# Altium PCB MAIN.PcbDoc (part 2 of 2)
Units mm, origin at the board's own origin, x right, y up, seen from the top; angles counter-clockwise.
Board outline 40 x 35 mm, 2 copper layers (Top Layer, Bottom Layer); 40 components, 37 nets, 199 pads, 289 vias.
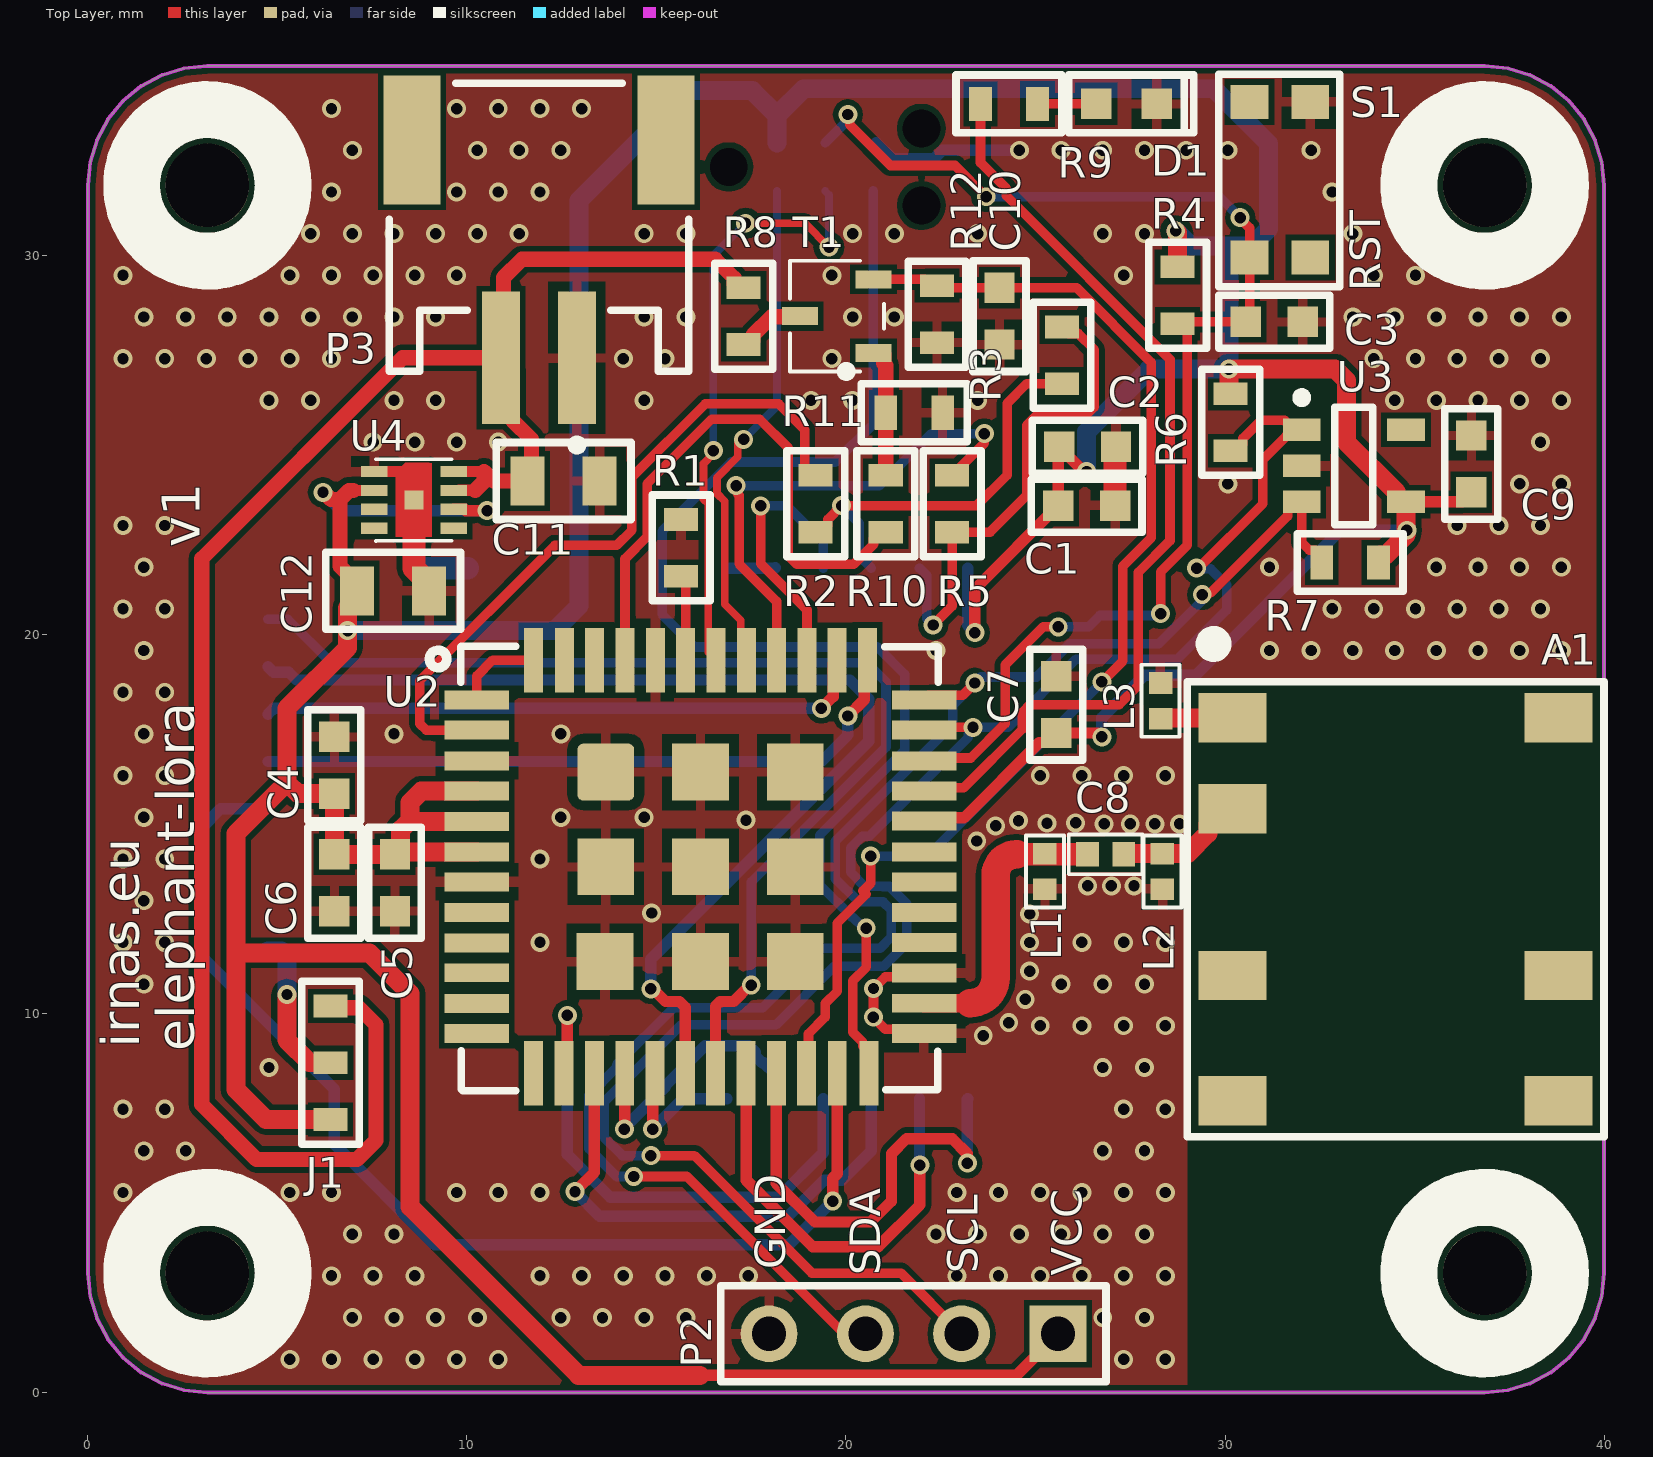
[diagram p0: Top Layer view]

## Via types
v1: diameter 0.5, hole 0.3, Top Layer to Bottom Layer, tented both sides, 289 vias

## Nets (pads, with @x,y where several pads share a name; then routed paths per layer and width w, separated by ;. In a path a pad name is that pad's centre, name@x,y a point inside that pad or via, vN(x,y) a via of type N, cw(c..) or ccw(c..) an arc to the next point about the centre after c; other vN are vias at no path point) (continued)
GND: (continued)
  other v1: 5.325,0.876 6.425,0.876 7.525,0.876 8.625,0.876 9.725,0.876 10.825,0.876 27.325,0.876 28.425,0.876 6.975,1.976 8.075,1.976 9.175,1.976 10.275,1.976 12.475,1.976 13.575,1.976 14.675,1.976 15.775,1.976 26.775,1.976 27.875,1.976 6.425,3.076 7.525,3.076 8.625,3.076 11.925,3.076 13.025,3.076 14.125,3.076 15.225,3.076 16.325,3.076 17.425,3.076 22.925,3.076 24.025,3.076 25.125,3.076 26.225,3.076 27.325,3.076 28.425,3.076 6.975,4.176 8.075,4.176 22.375,4.176 23.475,4.176 24.575,4.176 25.675,4.176 26.775,4.176 27.875,4.176 0.925,5.276 5.325,5.276 6.425,5.276 9.725,5.276 10.825,5.276 11.925,5.276 22.925,5.276 24.025,5.276 25.125,5.276 26.225,5.276 27.325,5.276 28.425,5.276 1.475,6.376 2.575,6.376 26.775,6.376 27.875,6.376 0.925,7.476 2.025,7.476 27.325,7.476 28.425,7.476 4.775,8.576 26.775,8.576 27.875,8.576 23.621,9.416 25.125,9.676 26.225,9.676 27.325,9.676 28.425,9.676 24.294,9.758 24.729,10.374 1.475,10.776 25.675,10.776 26.775,10.776 27.875,10.776 24.846,11.119 0.925,11.876 2.025,11.876 11.925,11.876 24.846,11.873 26.225,11.876 27.325,11.876 28.425,11.876 14.874,12.65 24.846,12.627 1.475,12.976 26.374,13.366 27,13.366 27.6,13.366 0.925,14.076 2.025,14.076 11.925,14.076 23.45,14.55 23.95,14.95 26.811,15.006 27.5,15.006 28.15,15.006 28.8,15.006 25.304,15.02 26.058,15.031 24.553,15.086 17.362,15.1 1.475,15.176 12.475,15.176 14.675,15.176 0.925,16.276 2.025,16.276 25.125,16.276 26.225,16.276 27.325,16.276 28.425,16.276 1.475,17.376 8.075,17.376 12.475,17.376 0.925,18.476 2.025,18.476 1.475,19.576 22.375,19.576 31.175,19.576 32.275,19.576 33.375,19.576 34.475,19.576 35.575,19.576 36.675,19.576 37.775,19.576 38.875,19.576 0.925,20.676 2.025,20.676 32.825,20.676 33.925,20.676 35.025,20.676 36.125,20.676 37.225,20.676 38.325,20.676 1.475,21.776 31.175,21.776 35.575,21.776 36.675,21.776 37.775,21.776 38.875,21.776 0.925,22.876 2.025,22.876 36.125,22.876 37.225,22.876 38.325,22.876 30.075,23.976 37.775,23.976 38.875,23.976 7.525,25.076 8.625,25.076 9.725,25.076 10.825,25.076 38.325,25.076 4.775,26.176 5.875,26.176 8.075,26.176 9.175,26.176 14.675,26.176 19.075,26.176 20.175,26.176 23.475,26.176 34.475,26.176 35.575,26.176 36.675,26.176 37.775,26.176 38.875,26.176 0.925,27.276 2.025,27.276 3.125,27.276 4.225,27.276 5.325,27.276 6.425,27.276 14.125,27.276 15.225,27.276 19.625,27.276 33.925,27.276 35.025,27.276 36.125,27.276 37.225,27.276 38.325,27.276 1.475,28.376 2.575,28.376 3.675,28.376 4.775,28.376 5.875,28.376 6.975,28.376 8.075,28.376 9.175,28.376 14.675,28.376 15.775,28.376 20.175,28.376 21.275,28.376 33.375,28.376 34.475,28.376 35.575,28.376 36.675,28.376 37.775,28.376 38.875,28.376 0.925,29.476 5.325,29.476 6.425,29.476 7.525,29.476 8.625,29.476 9.725,29.476 19.625,29.476 27.325,29.476 33.925,29.476 35.025,29.476 5.875,30.576 6.975,30.576 8.075,30.576 9.175,30.576 10.275,30.576 11.375,30.576 14.675,30.576 15.775,30.576 20.175,30.576 21.275,30.576 23.475,30.576 26.775,30.576 27.875,30.576 33.375,30.576 6.425,31.676 9.725,31.676 10.825,31.676 11.925,31.676 32.825,31.676 6.975,32.776 10.275,32.776 11.375,32.776 12.475,32.776 25.675,32.776 26.775,32.776 27.875,32.776 28.975,32.776 30.075,32.776 32.275,32.776 6.425,33.876 9.725,33.876 10.825,33.876 11.925,33.876 13.025,33.876
I2C1_SCL: P2.2 R6.1 U2.35 U3.1 | length 48.5
  Top Layer w0.254: v1(14.85,6.25) 16,6.25 19.102,3.148 21.452,3.148 P2.2 ; U2.35 22.135,17.55 v1(23.35,17.55) ; v1(29.25,21.75) 29.3,21.75 31,23.45 31,24.62 31.607,25.227 31.652,25.227 U3.1@31.825,25.4 ; R6.1 30.3,24.85 30.473,25.023 30.473,25.173 30.95,25.65 31.575,25.65 U3.1@31.825,25.4 ; U3.1 U3.1@31.825,25.4
  Bottom Layer w0.254: v1(14.85,6.25) 14.101,6.25 13.621,6.731 13.621,7.671 15.65,9.7 18.15,9.7 19.7,11.25 21,11.25 21.6,11.85 21.6,12.9 21.15,13.35 20.975,13.35 20.968,13.356 20.494,13.356 20.121,13.729 20.121,14.369 20.431,14.679 20.618,14.679 23.227,17.288 23.227,17.361 23.35,17.483 v1(23.35,17.55) 24.273,17.55 26.073,19.35 28.75,19.35 30.045,20.645 30.045,21.305 29.617,21.733 29.267,21.733 v1(29.25,21.75)
I2C1_SDA: P2.3 R7.1 U2.36 U3.3 | length 43.9
  Top Layer w0.254: v1(14.4,5.7) 15.8,5.7 19.95,1.55 P2.3 ; U2.36 22.178,18.393 23.073,18.393 v1(23.4,18.72) ; v1(29.4,21.05) 29.447,21.097 29.622,21.097 31.652,23.127 31.652,23.327 31.825,23.5 U3.3 32.025,22.425 32.227,22.223 32.377,22.223 32.55,22.05 R7.1
  Bottom Layer w0.254: v1(14.4,5.7) 13.95,5.7 13.214,6.436 13.214,7.839 13.95,8.575 13.95,8.65 15.45,10.15 17.801,10.15 19.372,11.721 20.896,11.721 21.194,12.018 21.194,12.732 20.982,12.944 20.806,12.944 20.8,12.95 20.325,12.95 19.714,13.561 19.714,14.538 22.821,17.644 22.821,18.141 v1(23.4,18.72) 23.557,18.877 25.026,18.877 25.905,19.756 28.255,19.756 29.4,20.901 v1(29.4,21.05)
LED: R9.1 U2.33 | length 24.8
  Top Layer w0.254: U2.33 22.143,15.958 23.108,15.958 24.65,17.5 24.65,17.947 24.853,18.15 27.205,18.15 27.711,18.656 27.711,21.636 28.55,22.475 28.55,27.255 24.229,31.576 24.229,31.769 23.55,32.449 R9.1
LORA_ANT: C8.1 L1.2 U2.26 | length 7.6
  Top Layer w0.5: U2.26 23.271,10.271
  Top Layer w0.6: 24.5,14.2 C8.1
  Top Layer w0.75: 23.271,10.271 ccw(c23.271,10.95) 23.95,10.95 ; 23.95,11.05 23.95,13.65 cw(c24.5,13.65) 24.5,14.2
LORA_BUSY: U1.14 U2.21 | length 12.1
  Top Layer w0.3: U2.21 18.162,5.518 19.182,4.498 20.648,4.498 21.2,5.05 21.2,6.3 21.6,6.7 22.8,6.7 23.2,6.3 v1(23.2,6.05)
  Bottom Layer w0.3: v1(23.2,6.05) 23.2,7.74 U1.14
LORA_RST: U1.15 U2.20 | length 11.4
  Top Layer w0.3: U2.20 17.37,8.413 17.37,5.599 19.119,3.85 20.85,3.85 21.95,4.95 v1(21.95,6)
  Bottom Layer w0.3: U1.15 21.94,6.01 v1(21.95,6)
MCU_IO1: P1.4 U2.23 | length 29.9
  Top Layer w0.3: v1(19.65,5.05) 19.65,5.654 19.769,5.773 U2.23
  Bottom Layer w0.3: P1.4 3.5,15.4 3,14.9 3,11.5 6.5,8 6.5,6.55 9.15,3.9 18.5,3.9 v1(19.65,5.05)
NetA1_1: A1.1 L3.2 | length 1.9
  Top Layer w0.5: L3.2 cw(c28.32,17.78) 28.32,17.8 A1.1
NetA1_2: A1.2 C8.2 L2.2 | length 3.5
  Top Layer w0.5: C8.2 cw(c27.35,14.2) 27.35,14.22 L2.2 29.02,14.22 29.55,14.75 29.55,15 29.95,15.4 A1.2
NetD1_2: D1.2 R9.2 | length 1.5
  Top Layer w0.254: R9.2 D1.2
NetR2_1: R2.1 R3.1 U1.7 | length 11.3
  Top Layer w0.254: R2.1 19.35,22.7 19.523,22.873 19.523,23.036 v1(19.887,23.4) 23.448,23.4 24.25,24.202 24.25,26.1 24.766,26.616 R3.1
  Bottom Layer w0.254: v1(19.887,23.4) 19.887,23.394 19.893,23.394 20.347,22.94 20.347,22.073 U1.7
NetR3_2: R3.2 R5.1 U1.8 | length 13.1
  Top Layer w0.254: v1(22.3,20.25) 22.8,20.75 R5.1 23.8,22.7 24.766,23.666 24.766,25.516 25.05,25.8 26.35,25.8 26.55,26 26.55,27.516 26.123,27.943 25.873,27.943 R3.2
  Bottom Layer w0.254: U1.8 22.132,21.558 22.132,20.418 v1(22.3,20.25)
NetR8_1: R8.1 T1.3 | length 1.9
  Top Layer w0.4: R8.1 17.45,27.65 17.55,27.75 17.55,27.9 18.033,28.383 18.763,28.383 T1.3
NetR10_2: R10.2 R11.2 T1.1 | length 3.5
  Top Layer w0.4: T1.1 20.955,27.43 20.995,27.39 20.995,27.155 21.05,27.1 R11.2 R10.2
NetU2_1: U2.1 U2.48 | length 2.3
  Top Layer w0.254: U2.1 10.26,18.91 10.675,19.325 U2.48
RESET: C3.2 CON1.3 R4.1 S1.1 U2.34 | length 34.5
  Top Layer w0.254: v1(20.05,33.72) 20.097,33.673 20.097,33.453 21.175,32.375 22.875,32.375 v1(23.7,31.55) ; U2.34 22.137,16.742 23.291,16.742 24.2,17.651 24.2,19.2 25.2,20.2 v1(25.6,20.2) v1@25.65,20.25 ; v1(28.3,20.55) 28.3,21.65 29,22.35 29,28 28.973,28.027 28.798,28.027 28.625,28.2 R4.1 28.8,28.25 C3.2 30.65,28.35 S1.1 30.65,30.728 30.4,30.978 v1(30.4,31)
  Bottom Layer w0.254: CON1.3 20.05,33.57 v1(20.05,33.72) ; v1(23.7,31.55) 29.85,31.55 v1(30.4,31) ; v1(25.6,20.2) 26.4,20.2 26.7,20.5 28.25,20.5 v1(28.3,20.55)
RXEN: U1.6 U2.39 | length 7.3
  Top Layer w0.254: v1(17.75,23.394) 17.75,21.87 18.97,20.65 U2.39
  Bottom Layer w0.254: v1(17.75,23.394) 18.441,23.394 19.4,22.435 U1.6
SPI2_MISO: U1.16 U2.15 | length 13.5
  Top Layer w0.3: v1(12.85,5.3) 13.362,5.811 U2.15
  Bottom Layer w0.3: v1(12.85,5.3) 13.5,4.65 18.469,4.65 19.421,5.602 19.879,5.602 19.887,5.595 20.668,6.376 20.668,7.748 U1.16
SPI2_MOSI: U1.17 U2.14 | length 14.4
  Top Layer w0.3: U2.14 12.65,8.508 v1(12.65,9.95)
  Bottom Layer w0.3: v1(12.65,9.95) 12.65,6.281 13.784,5.148 18.222,5.148 19.4,6.326 U1.17
SPI2_NSS: U1.19 U2.17 | length 3.8
  Top Layer w0.3: v1(14.9,6.95) 14.9,8.358 U2.17
  Bottom Layer w0.3: v1(14.9,6.95) 15.7,7.75 U1.19
SPI2_SCK: U1.18 U2.16 | length 7.4
  Top Layer w0.3: v1(14.15,6.95) 14.162,6.962 U2.16
  Bottom Layer w0.3: v1(14.15,6.95) 14.15,6.981 15.237,8.068 15.237,8.104 16.285,9.152 17.219,9.152 17.435,9.152 17.612,8.975 17.612,8.876 17.788,8.7 17.83,8.7 18.13,8.4 U1.18
SWCLK: CON1.4 U2.42 | length 16.1
  Top Layer w0.203: v1(16.5,24.85) 16.5,24.77 16.24,24.51 16.24,23.573 16.363,23.45 16.363,19.532 U2.42 ; v1(17.35,30.85) 18.92,30.85 v1(19.55,30.22)
  Bottom Layer w0.203: v1(16.5,24.85) 16.5,30 v1(17.35,30.85) ; CON1.4 19.55,31.6 v1(19.55,30.22)
SWDIO: CON1.2 U2.41 | length 13.4
  Top Layer w0.203: v1(17.3,25.15) 17.246,25.096 17.204,25.096 17.147,25.039 17.147,24.689 16.596,24.138 16.596,23.721 16.8,23.517 16.8,20.8 17.222,20.378 17.222,19.473 U2.41
  Bottom Layer w0.203: v1(17.3,25.15) 18.18,26.03 CON1.2
TXEN: R2.2 U2.2 | length 18.4
  Top Layer w0.254: U2.2 8.925,17.475 8.75,17.65 8.75,18.779 12.321,22.35 13.95,22.35 14.35,22.75 14.35,24.15 16.286,26.086 18.226,26.086 18.91,25.402 18.91,24.373 19.083,24.2 R2.2
UART2_TX: CON1.6 U2.24 | length 34.5
  Top Layer w0.254: v1(20.534,12.25) 20.534,11.216 20.175,10.857 20.175,9.508 20.447,9.237 20.447,9.143 20.487,9.143 20.61,9.02 U2.24
  Bottom Layer w0.254: v1(20.534,12.25) 20.468,12.25 20.174,12.544 20.157,12.544 19.308,13.393 19.308,14.706 21.55,16.948 21.55,18.95 20.829,19.671 16.008,19.671 15.15,20.529 15.15,22.728 16.972,24.55 19.713,24.55 20.72,25.557 CON1.6
USART1_CTS: P1.6 U2.38 | length 16.1
  Top Layer w0.3: v1(19.35,18.05) 19.66,18.36 19.66,19.225 U2.38
  Bottom Layer w0.3: P1.6 4.9,18.05 v1(19.35,18.05)
USART1_RTS: P1.5 U2.37 | length 17.8
  Top Layer w0.3: v1(20.05,17.85) 20.479,18.279 20.479,19.234 U2.37
  Bottom Layer w0.3: P1.5 19.35,16.65 20.05,17.35 v1(20.05,17.85)
USART1_RX: P1.7 U2.18 | length 29.1
  Top Layer w0.3: v1(14.85,10.65) 14.904,10.65 15.236,10.318 15.606,10.318 15.762,10.162 U2.18
  Bottom Layer w0.3: P1.7 4.9,19 5.3,19 5.5,18.8 20.1,18.8 20.602,18.298 20.602,17.184 14.85,11.431 v1(14.85,10.65)
USART1_TX: P1.8 U2.19 | length 29.4
  Top Layer w0.3: U2.19 16.556,8.426 16.556,10.194 16.68,10.318 17.037,10.318 17.469,10.75 v1(17.5,10.75)
  Bottom Layer w0.254: P1.8 5.271,20.4 6.421,19.25 20.55,19.25 21.055,18.745 21.055,17.028 17.5,13.473 v1(17.5,10.75)
VBAT: C11.2 J1.1 P3.2 R8.2 U4.7 U4.8 | length 50.1
  Top Layer w0.3: U4.8 10.45,24.3 ; U4.7@9.8,23.802 10.216,23.802
  Top Layer w0.4: J1.1 6.447,10.153 7.151,10.153 7.6,9.704 7.6,6.65 7.1,6.15 4.45,6.15 3,7.6 3,22 8.3,27.3 P3.2 ; 10.216,23.802 10.45,24.036 10.45,24.3 10.582,24.168 10.7,24.05 C11.2 11.7,24.15 11.7,25.15 11.2,25.65 11.2,27 P3.2 ; R8.2 17.15,29.15 17.05,29.25 17.05,29.4 16.55,29.9 11.45,29.9 10.966,29.416 10.966,27.366 P3.2
VCC_EXT: J1.2 P1.1 | length 4.2
  Top Layer w0.5: v1(5.25,10.5) 5.25,9.3 5.85,8.7 J1.2
  Bottom Layer w0.5: P1.1 5.1,11.65 5.25,11.5 v1(5.25,10.5)
VMCU: C1.2 C2.2 C4.2 C5.2 C6.2 C7.2 C9.2 C12.2 CON1.1 J1.3 P2.1 R4.2 R6.2 R7.2 U1.9 U2.4 U2.5 U2.6 U2.32 U3.4 U4.2 U4.6 | length 157.9
  Top Layer w0.3: 7,23.8 U4.2 ; U4.6 9.938,23.3 9.971,23.267 v1(10.533,23.267) ; 16.15,0.452 24.492,0.452 P2.1 ; U2.32 22.146,15.161 23.111,15.161 25.1,17.15 25.3,17.15 C7.2 26.65,17.4 v1(26.75,17.3) ; v1(23.4,20.05) 23.4,21.2 C1.2 25.6,24.926 C2.2 26.274,24.3 v1(26.35,24.3) ; U3.4 36.25,23.5 C9.2
  Top Layer w0.4: v1(6.2,23.75) 6.227,23.75 6.411,23.566 6.65,23.566 ; C12.2@6.85,20.7 7.1,20.95 C12.2 7.1,21.35 6.65,21.8 6.65,23.566 ; 7,23.8 6.884,23.8 6.65,23.566
  Top Layer w0.5: J1.3 4.7,7.2 3.9,8 3.9,11.6 ; C12.2@6.85,20.7 v1(6.85,20.1) 6.85,19.65 5.25,18.05 5.25,16.093 ; U2.6 C5.2@8.165,14.265 ; U2.5 8.465,15.065 ; U2.4 8.793,15.865 8.5,15.572 8.5,15.1 8.465,15.065 ; 16.15,0.452 12.948,0.452 8.5,4.9 8.5,10.525 7.425,11.6 3.9,11.6 ; v1(28.7,30.65) 28.75,30.6 R4.2 ; R6.2 30.1,26.4 v1(30.1,27) 32.907,27 33.2,26.707 33.2,25.075 U3.4@34.525,23.75 ; R7.2 34.05,22.05 34.1,22.1 34.25,22.1 v1@34.775,22.625 ; v1@34.775,22.75 U3.4 ; 3.9,11.6 3.9,14.743 5.25,16.093 ; 5.25,16.093 5.543,15.8 C4.2 C6.2 C5.2 C5.2@8.165,14.265 ; C5.2@8.165,14.265 8.25,14.35 8.25,14.85 8.465,15.065
  Bottom Layer w0.3: v1(6.2,23.75) 6.683,23.267 v1(10.533,23.267) ; U1.9 23.21,20.24 v1(23.4,20.05) ; v1(26.75,17.3) 26.75,17.8 27.871,18.921 29.221,18.921 33.05,22.75 v1(34.8,22.75)
  Bottom Layer w0.5: v1(6.85,20.1) 12.3,20.1 12.95,20.75 12.95,31.45 15.85,34.35 17.53,34.35 18.18,33.7 ; CON1.1 18.18,33.7 ; v1(26.35,24.3) 26.35,25.35 28,27 v1(30.1,27) 30.1,30.25 ; v1(28.7,30.65) 29.1,30.25 30.1,30.25 ; 18.18,33.7 18.88,34.4 29.7,34.4 31.15,32.95 31.15,30.7 30.7,30.25 30.1,30.25
pads on no net: A1.3 A1.4 A1.5 A1.6 A1.7 CON1.0 P1.2 P1.3 P3.MP1 P3.MP2 S1.2 S1.3 U1.13 U1.21 U2.8 U2.9 U2.10 U2.11 U2.12 U2.13 U2.28 U2.29 U2.30 U2.31 U2.46 U2.47 U3.5 U4.3 U4.4 U4.5

## Polygon pours and split planes (outlines as drawn)
GND on Top Layer "GND_L01_P000" (solid, pour order 0): 40,31.852 39.94,32.466 39.76,33.057 39.469,33.601 39.078,34.078 38.601,34.469 38.057,34.76 37.466,34.939 36.852,35 3.148,35 2.534,34.939 1.943,34.76 1.399,34.469 0.922,34.078 0.531,33.601 0.24,33.057 0.06,32.466 0,31.852 0,3.148 0.06,2.534 0.24,1.943 0.531,1.399 0.922,0.922 1.399,0.53 1.943,0.239 2.534,0.06 3.148,0 36.852,0 37.466,0.06 38.057,0.239 38.601,0.53 39.078,0.922 39.469,1.399 39.76,1.943 39.94,2.534 40,3.148
GND on Bottom Layer "GND_L02_P001" (solid, pour order 1): 40,31.852 39.94,32.466 39.76,33.057 39.469,33.601 39.078,34.078 38.601,34.469 38.057,34.76 37.466,34.939 36.852,35 3.148,35 2.534,34.939 1.943,34.76 1.399,34.469 0.922,34.078 0.531,33.601 0.24,33.057 0.06,32.466 0,31.852 0,3.148 0.06,2.534 0.24,1.943 0.531,1.399 0.922,0.922 1.399,0.53 1.943,0.239 2.534,0.06 3.148,0 36.852,0 37.466,0.06 38.057,0.239 38.601,0.53 39.078,0.922 39.469,1.399 39.76,1.943 39.94,2.534 40,3.148

## Keep-outs
Keep-Out Layer:
  the board outline again, w0.1

## Other copper
Top Layer:
  pour cut-out: 29,18.8 40,18.8 40,3.148 cw(c36.902,3.148) 36.902,0.05 36.8,0.05 36.75,0 29,0
Bottom Layer:
  pour cut-out: 29,18.8 40,18.8 40,3.148 cw(c36.902,3.148) 36.902,0.05 36.8,0.05 36.75,0 29,0

## Silkscreen, mask and mechanical layers (free items; w line width, h text height)
Top Overlay:
  circle w1.5: c3.15,31.85 r2
  circle w1.5: c3.15,3.15 r2
  circle w1.5: c36.85,3.15 r2
  circle w1.5: c36.85,31.85 r2
  text "RST" at 34.1,29.05 h0.8 r90
  text "v1" at 2.95,22.3 h1 r90
  text "irnas.eu" at 1.35,9.1 h1 r90
  text "elephant-lora" at 2.8,9 h1 r90
  text "GND" at 18.4,3.25 h0.8 r90
  text "SCL" at 23.475,3.15 h0.8 r90
  text "SDA" at 20.9,3.1 h0.8 r90
  text "VCC" at 26.225,3.076 h0.8 r90
Bottom Overlay:
  circle w1.5: c3.15,31.85 r2
  circle w1.5: c3.15,3.15 r2
  circle w1.5: c36.85,3.15 r2
  circle w1.5: c36.85,31.85 r2
  text "irnas.eu" at 34.2,23.85 h1 r90
  text "elephant-lora" at 35.95,23.85 h1 r90
  text "GND" at 7.5,22.6 h0.6
  text "TX" at 7.4,20.15 h0.6
  text "RX" at 7.4,18.85 h0.6
  text "CTS" at 7.55,17.55 h0.6
  text "RTS" at 7.45,16.35 h0.6
  text "IO1" at 7.4,15.176 h0.6
  text "VCC" at 7,11.95 h0.8 r90
  text "v1" at 36.05,10.75 h1 r90
  text "SDA" at 19.95,3.1 h0.8 r270
  text "SCL" at 22.7,3.1 h0.8 r270
  text "VCC" at 25.45,3.1 h0.8 r270
  text "GND" at 17.45,3 h0.8 r270
Mechanical 1:
  lines w0.2: 9.3,34.7 9.3,31.3 9.35,31.25 29.45,31.25 29.5,31.3 29.5,34.65
Mechanical 13:
  drawing of 1098 lines, arcs and shapes, not listed
  text ".Website" at 199.993,-119.672 h2.5
  text ".Company" at 175.493,-119.822 h2.5
  text ".ProjectTitle" at 175.493,-123.172 h2.5
  text ".PCBDesigner" at 175.393,-126.622 h2.5
  text ".Version" at 175.593,-129.972 h2.5
  text ".RevisionDate" at 175.493,-133.522 h2.5
Mechanical 14:
  drawing of 1099 lines, arcs and shapes, not listed
  text ".Company" at -133.657,-119.672 h2.5
  text ".Website" at -157.657,-119.722 h2.5
  text ".ProjectTitle" at -133.657,-123.022 h2.5
  text ".PCBDesigner" at -133.657,-126.472 h2.5
  text ".Version" at -133.657,-130.172 h2.5
  text ".RevisionDate" at -133.657,-133.372 h2.5

## Dimensions
3.148,35 to 3.148,0 on Mechanical 1
0,31.852 to 40,31.852 on Mechanical 1

## Text inside footprints (layer, text, board x,y; h text height)
CON1: Bottom Overlay "ICSP" at 15.1,30.95 h0.8 r270